# Altium PCB current_unit.PcbDoc
Units mm, origin at the board's own origin, x right, y up, seen from the top; angles counter-clockwise.
Board outline 45 x 25 mm, 4 copper layers (Top Layer, Signal Layer 1, Internal Plane 1, Bottom Layer), stack 1.48 mm thick; 35 components, 30 nets, 136 pads, 45 vias.
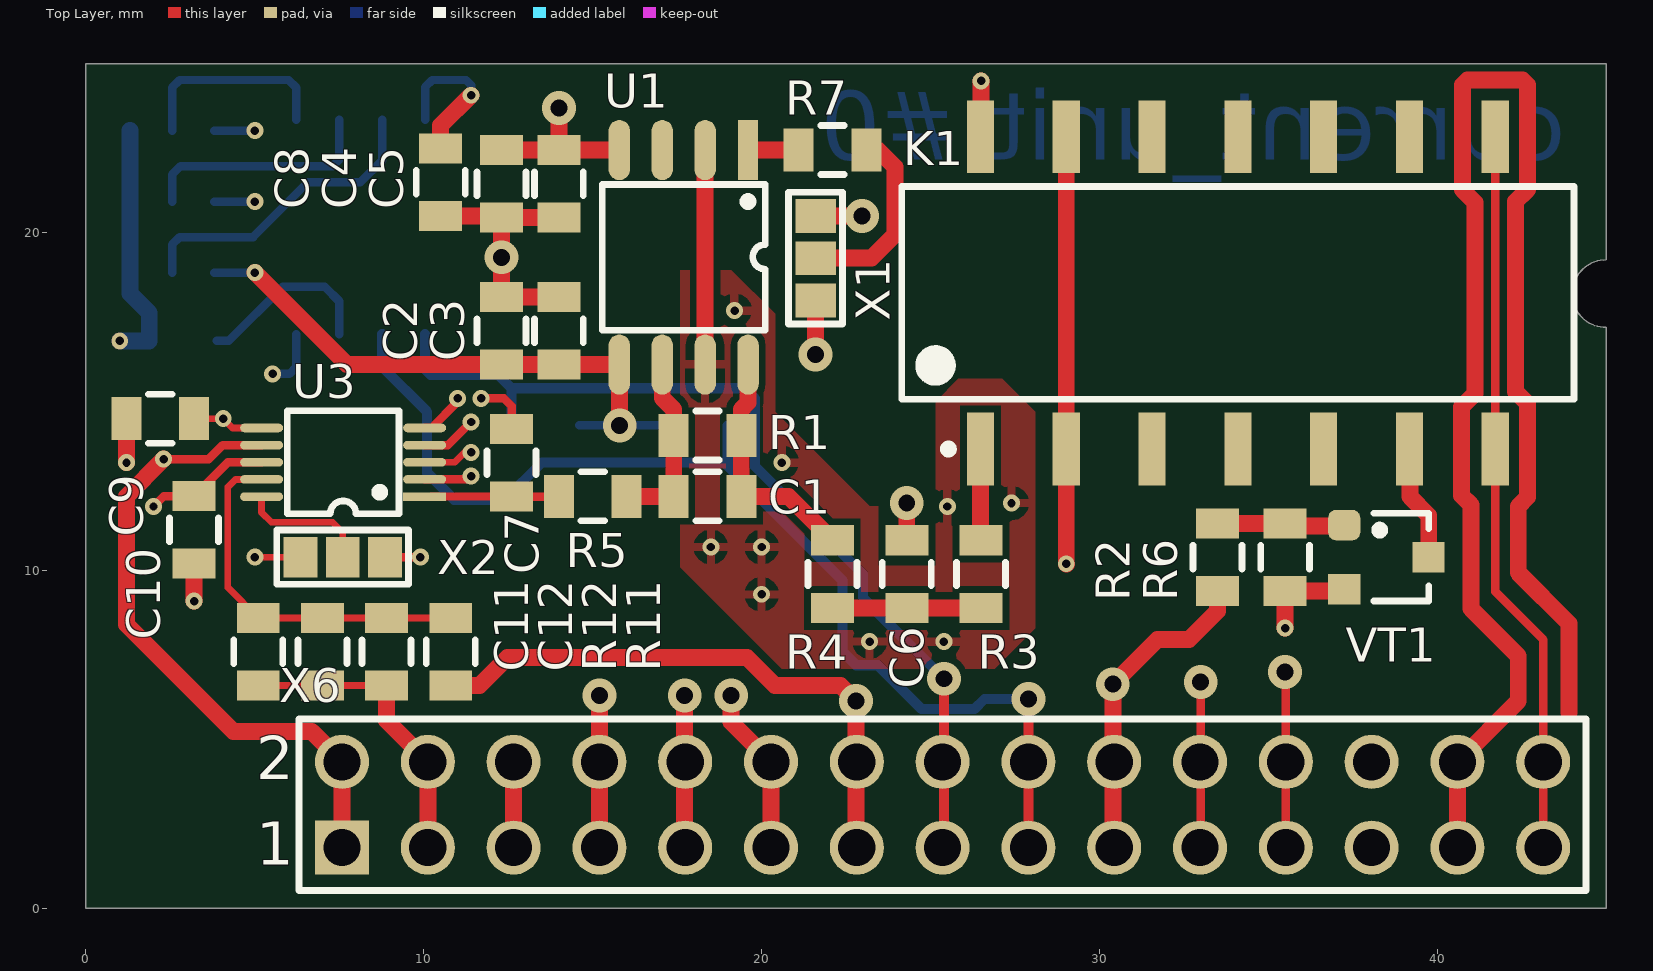
[diagram p0: Top Layer view]
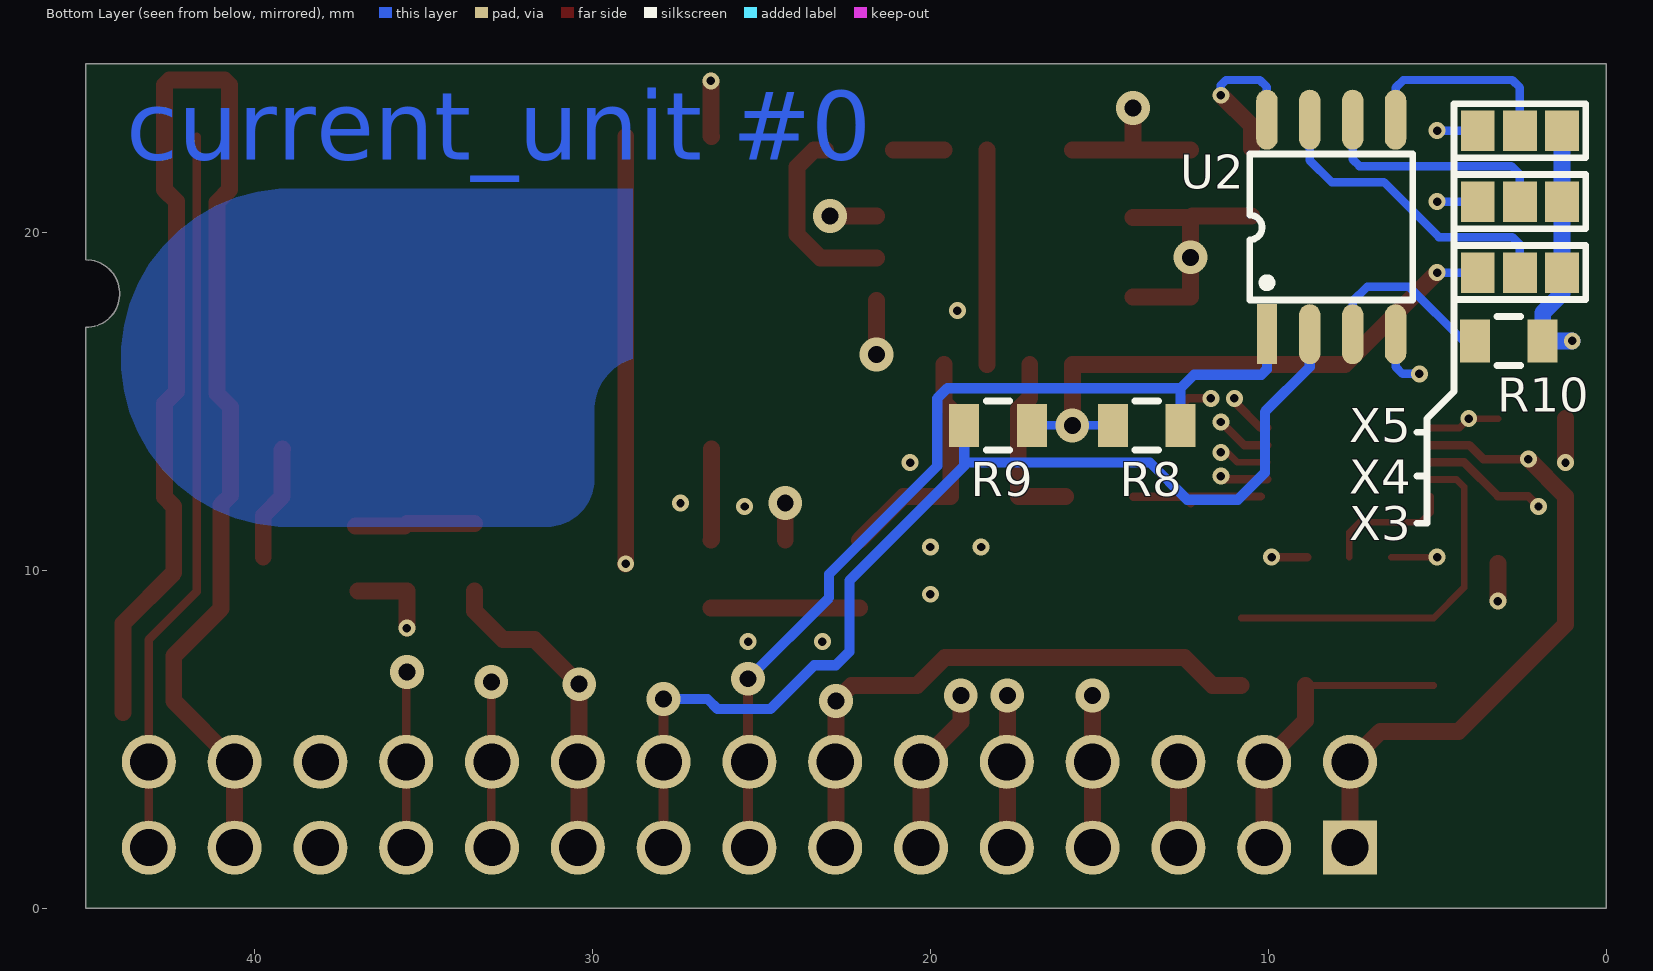
[diagram p1: Bottom Layer view, seen from below]
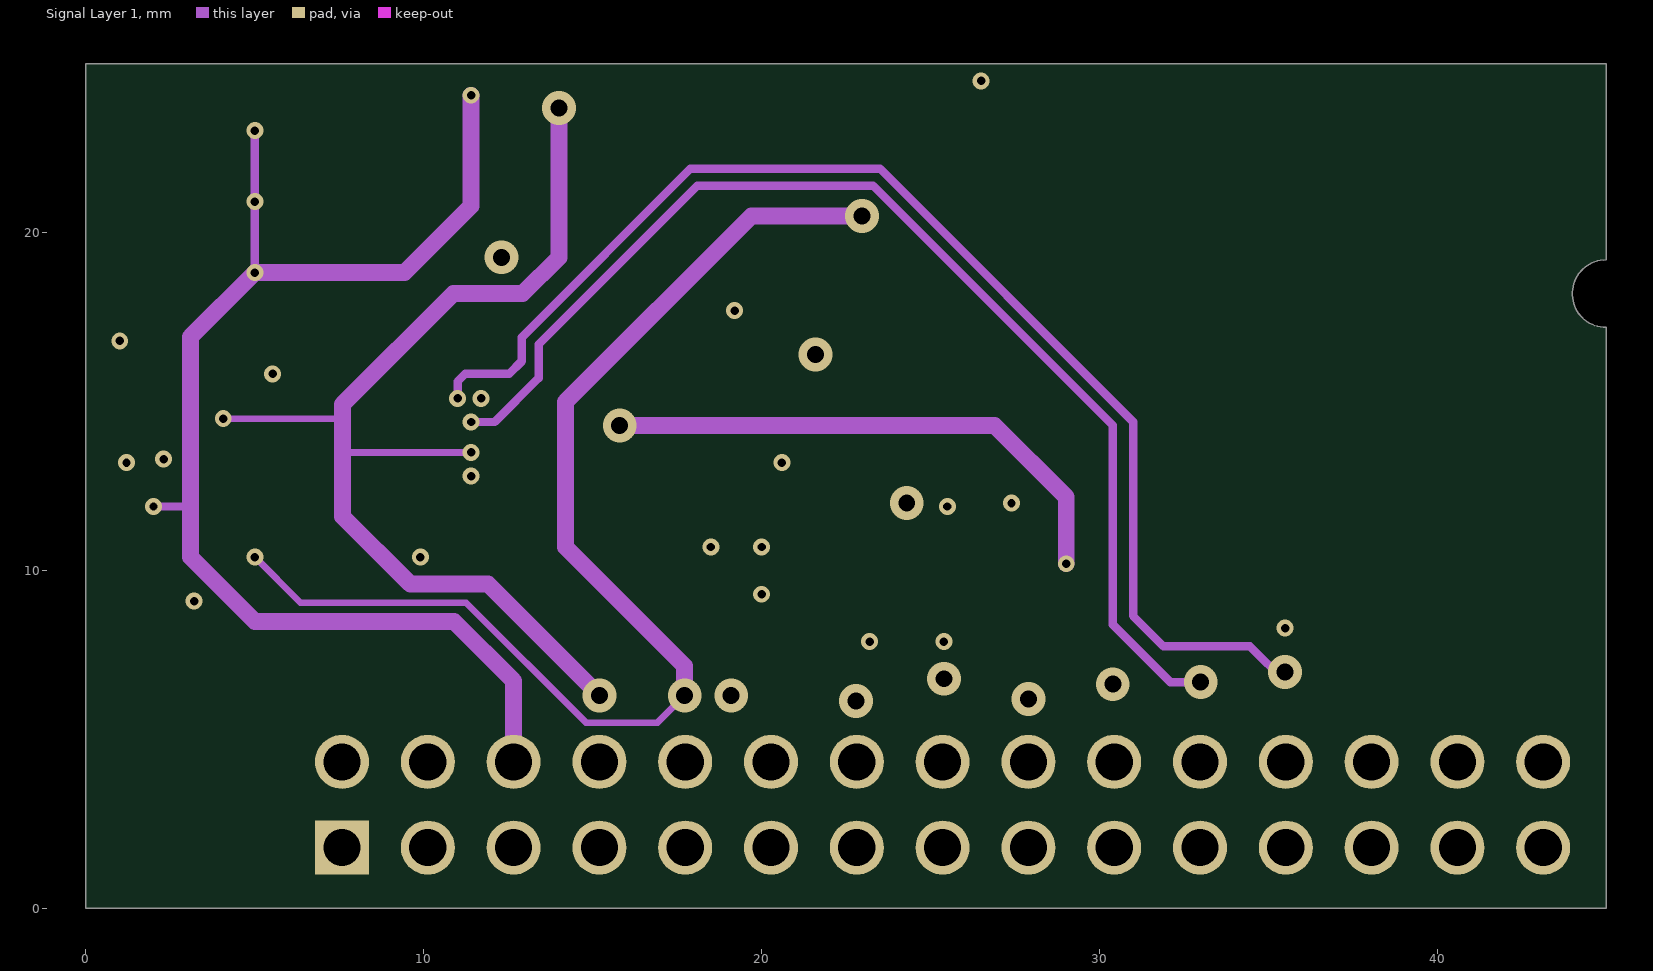
[diagram p2: Signal Layer 1]
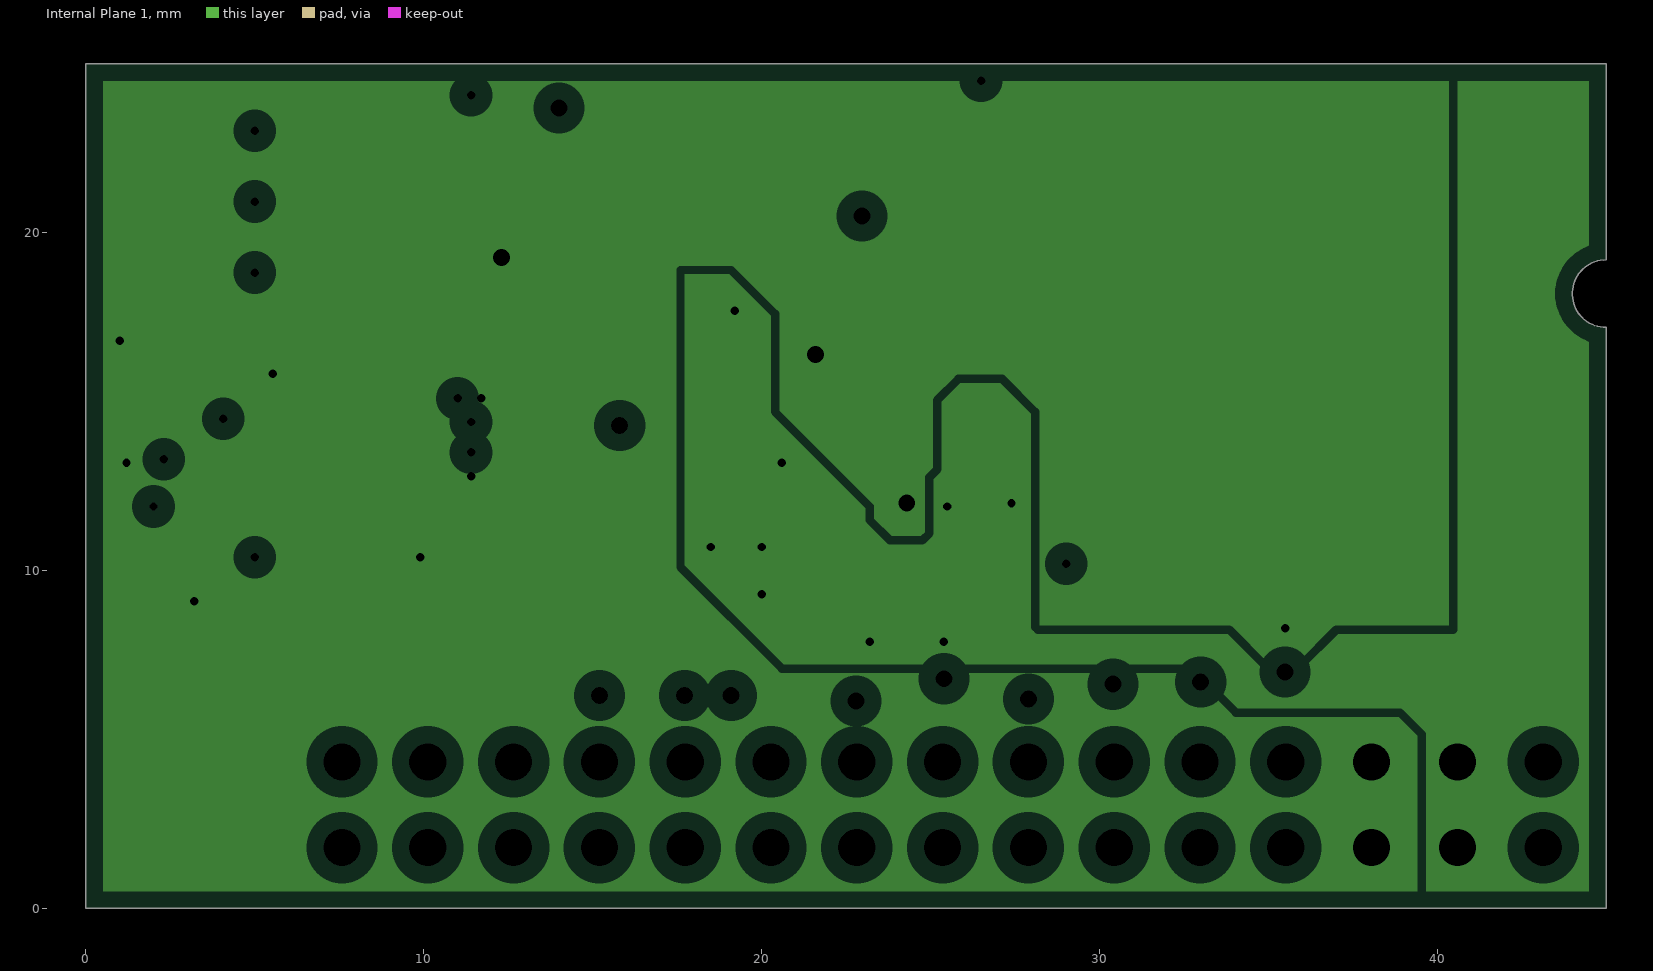
[diagram p3: Internal Plane 1, clearances drawn from the general rule]
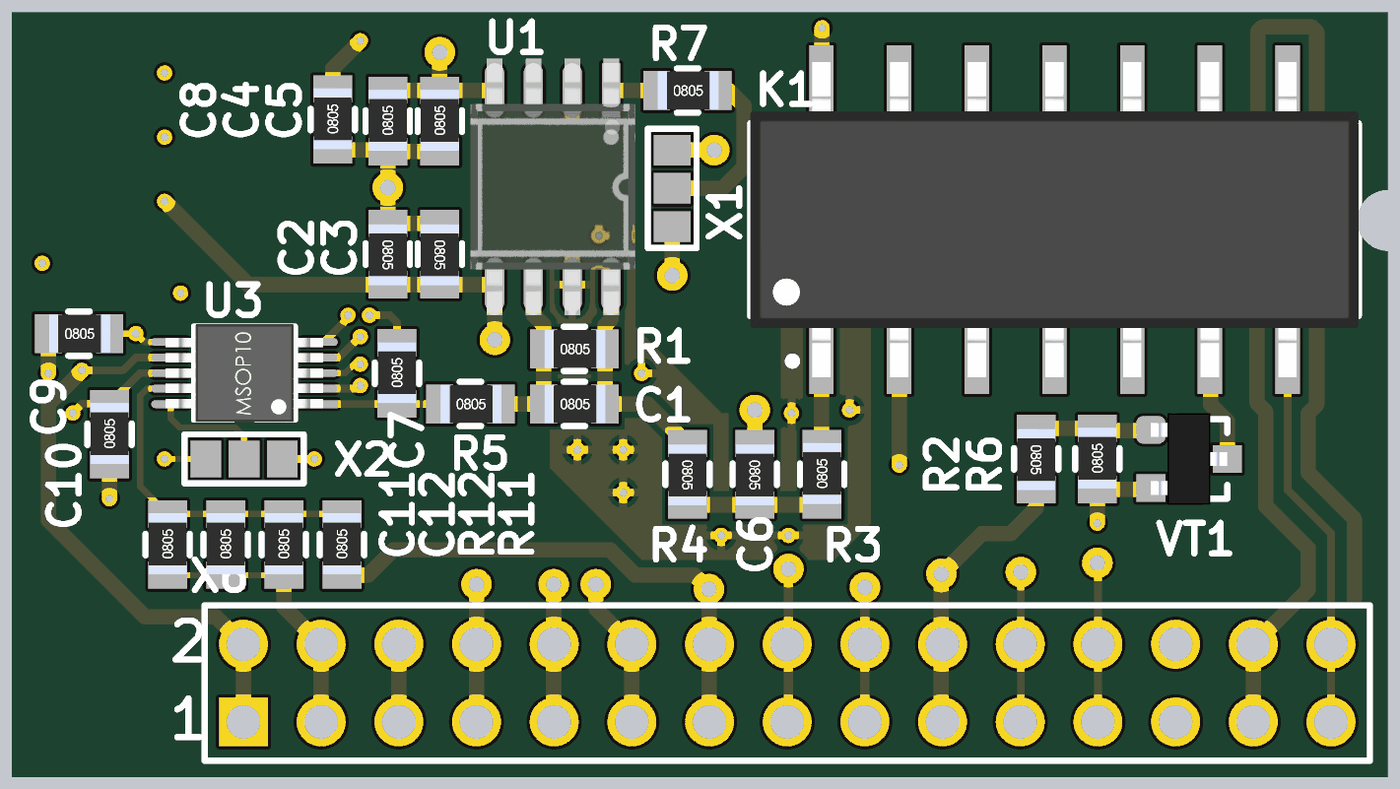
[diagram p4: 3D render of the assembled board from above, using the file's embedded part models]
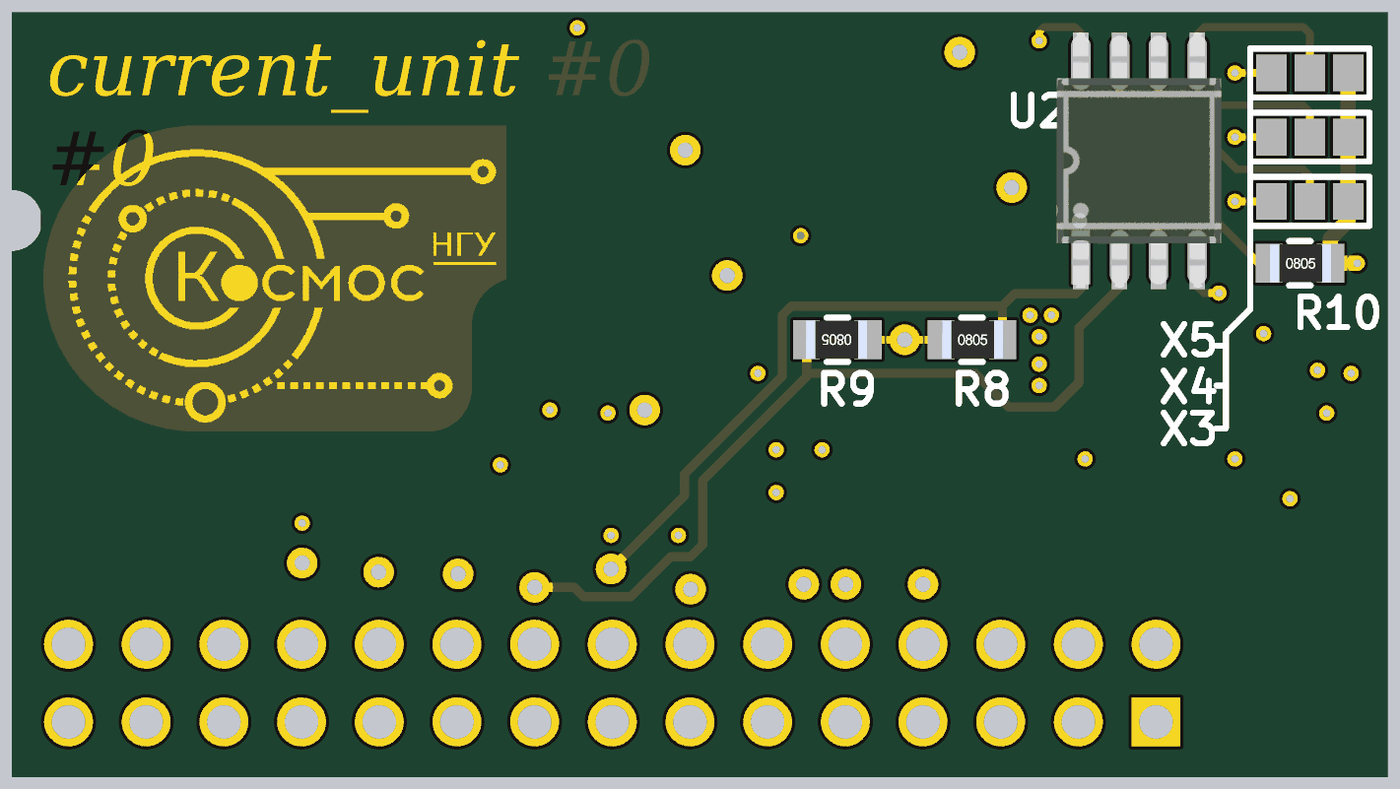
[diagram p5: 3D render of the assembled board from below, using the file's embedded part models]

## Layer stack, top to bottom
Top Solder: solder mask 0.01, Solder Resist, Dk 3.5
Top Layer: signal copper 0.035
Dielectric1: core 0.32, FR-4, Dk 4.8
Signal Layer 1: signal copper 0.035
Dielectric2: core 0.7, FR-4, Dk 4.8
Internal Plane 1: plane copper 0.035, net (Multiple Nets)
Dielectric3: core 0.32, FR-4, Dk 4.8
Bottom Layer: signal copper 0.035
Bottom Solder: solder mask 0.01, Solder Resist, Dk 3.5

## Board outline
0,0 0,25 45,25 45,19.2 ccw(c45,18.2) 45,17.2 45,0

## Design rules (kind name [scope] priority, off if disabled: settings)
Clearance [All] p1: gap=0.2 ignorepadtopadclearanceinfootprint=FALSE
PlaneClearance [All] p1: clearance=0.508
PlaneConnect [All] p1: planeconnectstyle=Relief reliefexpansion=0.508 reliefentries=4 reliefconductorwidth=0.254 reliefairgap=0.254
PolygonConnect [All] p1: connectstyle=Relief reliefconductorwidth=0.254 reliefentries=4 polygonreliefangle="90 Angle" airgapwidth=0.254
RoutingVias [All] p1: holewidth=0.5 width=0.5 viastyle="Through Hole" minholewidth=0.2 minwidth=0.5 maxholewidth=4 maxwidth=5
SolderMaskExpansion [All] p1: expansion=0.102
Width [All] p1: maxlimit=2 minlimit=0.2 preferedwidth=0.5
28 further rules are at their usual default settings.

## Components (designator, comment, footprint, x,y, rotation, side; value= is the part's Value field where it differs from the comment)
C1 "1500пФ" CR-0805 17.4,12.2 r0 top
C2 "10мкФ" CR-0805 12.3,18.1 r270 top
C3 "0,1мкФ" CR-0805 14,18.1 r270 top
C4 "10мкФ" CR-0805 12.3,20.45 r90 top
C5 "0,1мкФ" CR-0805 14,20.45 r90 top
C6 "480нФ" CR-0805 24.3,10.9 r270 top
C7 "4,7мкФ" CR-0805 12.6,12.2 r90 top
C8 "0,1мкФ" CR-0805 10.5,20.5 r90 top
C9 "0,22мкФ" CR-0805 1.2,14.5 r0 top
C10 "0,22мкФ" CR-0805 3.2,10.208 r90 top
C11 "0,1мкФ" CR-0805 5.1,6.6 r90 top
C12 "10мкФ" CR-0805 7,6.6 r90 top
K1 "EDR3D1C05" SOP-14 26.48,13.6 r0 top
R1 "5М" CR-0805 17.4,14 r0 top
R2 "5к" CR-0805 33.5,11.4 r270 top
R3 "1к" CR-0805 26.5,8.9 r90 top
R4 "10к" CR-0805 22.1,10.9 r270 top
R5 "100" CR-0805 14,12.2 r0 top
R6 "20к" CR-0805 35.5,9.4 r90 top
R7 "10к" CR-0805 21.1,22.45 r0 top
R8 "NU" CR-0805 14.6,14.3 r180 bottom
R9 "NU" CR-0805 17,14.3 r0 bottom
R10 "10к" CR-0805 3.875,16.8 r180 bottom
R11 "10к" CR-0805 10.8,6.6 r90 top
R12 "10к" CR-0805 8.9,6.6 r90 top
U1 "ADA4530-1" SOIC-8 19.6,22.45 r180 top
U2 "TMP1075" SOIC-8 10.04,17 r180 bottom
U3 "AD8253ARM" MSOP-10 10.026,12.192 r90 top
VT1 "BC846BWT1" SOT-23 38.5,10.4 r270 top
X1 "MHDR1X3" SJMP-3 21.6,18 r0 top
X2 "MHDR1X3" SJMP-3 8.85,10.4 r90 top
X3 "MHDR1X3" SJMP-3 3.8,18.825 r270 bottom
X4 "MHDR1X3" SJMP-3 3.8,20.925 r270 bottom
X5 "MHDR1X3" SJMP-3 3.8,23.025 r270 bottom
X6 "HDR2X15" HDR2X15 7.58,1.8 r0 top

## Footprints (in the part's own frame and the unit in brackets; to place one, negate y for a bottom-side part, rotate by r counter-clockwise, add the part's x,y. Pads: shape width x height; smd on the part's side, far side on the other; paste and mask are expansions set on the pad)
CR-0805 [mil]
  rect 35x50 smd: 1(0,0) 2(78.74,0)
  silkscreen extent 26,-29 53,29, body extent 1,-25 80,25, height 17
HDR2X15 [mm] "Connector; Header; 15x2 Position"
  rect 1.6x1.6 hole 1.1: 1(0,0)
  round 1.6 hole 1.1: 2(0,2.54) 3(2.54,0) 4(2.54,2.54) 5(5.08,0) 6(5.08,2.54) 7(7.62,0) 8(7.62,2.54) 9(10.16,0) 10(10.16,2.54) 11(12.7,0) 12(12.7,2.54) 13(15.24,0) 14(15.24,2.54) 15(17.78,0) 16(17.78,2.54) 17(20.32,0) 18(20.32,2.54) 19(22.86,0) 20(22.86,2.54) 21(25.4,0) 22(25.4,2.54) 23(27.94,0) 24(27.94,2.54) 25(30.48,0) 26(30.48,2.54) 27(33.02,0) 28(33.02,2.54) 29(35.56,0) 30(35.56,2.54)
  silkscreen extent -1.27,-1.27 36.83,3.81
MSOP-10 [mil] "10-Lead Mini Small Outline Package"
  rect 10x50 smd: 1(0,0)
  oval 10x50 smd: 2(20,0) 3(40,0) 4(60,0) 5(80,0) 6(80,190) 7(60,190) 8(40,190) 9(20,190) 10(0,190)
  silkscreen extent -20,30 100,160, body extent -23,-6 103,196, height 42
SJMP-3 [mm]
  rect 1.2x1 smd: 1(0,0) 2(0,1.25) 3(0,2.5)
  silkscreen extent -0.8,-0.7 0.8,3.2
SOIC-8 [mil]
  rect 23.62x70 smd: 1(0,0)
  oval 25x70 smd: 2(50,0) 3(100,0) 4(150,0) 5(150,250) 6(100,250) 7(50,250) 8(0,250)
  silkscreen extent -20,40 170,210, body extent -31,-41 181,289, height 90
SOP-14 [mm] "SOP, 14-Leads, Body 19,90x6,90mm, Pitch 2,54mm, IPC Medium Density"
  rect 0.8x2.15 smd: 1(0,0) 2(2.54,0) 3(5.08,0) 4(7.62,0) 5(10.16,0) 6(12.7,0) 7(15.24,0) 8(15.24,9.25) 9(12.7,9.25) 10(10.16,9.25) 11(7.62,9.25) 12(5.08,9.25) 13(2.54,9.25) 14(0,9.25)
  silkscreen extent -2.33,-0.12 17.57,7.78, body extent -2.33,-0.53 17.57,9.77, height 6
SOT-23 [mm]
  rrect50% 0.9x0.95 smd: 1(-0.95,-1.25)
  rect 0.9x0.95 smd: 2(0.95,-1.25) 3(0,1.25)
  silkscreen extent -1.3,-0.38 1.3,1.25, body extent -1.5,-1.25 1.5,1.25, height 1.08

## Part data
C1 C2 C3 C4 C5 C6 C7 C8 C9 C10 C11 C12: library part C_smd, "Конденсатор для поверхностного монтажа", Назначение=Чип-конденсатор, Наименование="К10-79 МП0 «ВП»", Потребление, Вт=0
K1: "Reed Relay", Назначение="Герконовое реле", Наименование=EDR3D1C05, Потребление, Вт=0,125
R1 R2 R3 R4 R5 R6 R7 R8 R9 R10 R11 R12: library part R_smd, "Резистор для поверхностного монтажа", Назначение=Чип-резистор, Наименование="Р1-12-0.125 ОСМ", Потребление, Вт=0,001
U1: library part ADA4530, "Ultra-Low Bias Current Difet OpAmp", Назначение="Операционный усилитель с малым входным током", Наименование=ADA4530, Потребление, Вт=0,01
U2: "TMP1075 Temperature Sensor With I2C and SMBus Interface", Назначение="Датчик температуры I2C", Наименование=TMP1075DR, Потребление, Вт=0,001
U3: library part AD8253, "10 MHz, 20 V/мs, G = 1, 10, 100, 1000 iCMOS Programmable Gain Instrumentation Amplifier", Назначение="Операционный усилитель с программируемым КУ (1, 10, 100, 1000)", Наименование=AD8253ARM, Потребление, Вт=0,05
VT1: "General Purpose Transistor, NPN Silicon, 3-Pin SC70, Tape and Reel", Manufacturer="On Semiconductor", ComponentLink1Description="Manufacturer URL", ComponentLink1URL=http://www.onsemi.com/, ComponentLink2Description=Datasheet, ComponentLink2URL=http://www.onsemi.cn/pub_link/Collateral/BC846AWT1-D.PDF, ComponentLink3Description="Package Specification", ComponentLink3URL=http://www.onsemi.cn/pub_link/Collateral/419-04.PDF, DatasheetVersion="Rev. 9", fT Min (MHz)=100, IC Continuous (A)=0.1, Mounting Technology="Surface Mount", Note1=0, PackageDescription="3-Pin Small Outline Transistor, Body 2 x 1.25 mm, Pitch 0.65 mm", PackageReference=SC-70-3-419-04, PackageVersion="Rev. N, 11/2008", Packing="Tape and Reel", PartNumber=BC846BWT1, Polarity=NPN, RoHS=FALSE, Назначение="Транзистор NPN", Наименование=BC846W, Потребление, Вт=0,01
X1 X2 X3 X4 X5: "Header, 3-Pin", LatestRevisionDate=17-Jul-2002, LatestRevisionNote="Re-released for DXP Platform.", Publisher="Altium Limited", Назначение="Вилка штыревая 2мм 1х3 прямая", Наименование=PLS2-3
X6: "Header, 15-Pin, Dual row", LatestRevisionDate=17-Jul-2002, LatestRevisionNote="Re-released for DXP Platform.", Publisher="Altium Limited", Назначение="Вилка штыревая 2.54мм 2х15 угловая", Наименование=PLD-30R

## Via types
v1: diameter 0.5, hole 0.25, Top Layer to Bottom Layer, 30 vias
v2: diameter 1, hole 0.5, Top Layer to Bottom Layer, 15 vias

## Nets (pads, with @x,y where several pads share a name; then routed paths per layer and width w, separated by ;. In a path a pad name is that pad's centre, name@x,y a point inside that pad or via, vN(x,y) a via of type N, cw(c..) or ccw(c..) an arc to the next point about the centre after c; other vN are vias at no path point)
+0V15: X1.3 X2.3 X6.9 X6.10 | length 43.5
  Top Layer w0.2: v1(5,10.4) X2.3
  Top Layer w0.5: v2(17.724,6.3) 17.724,1.816 X6.9 ; X1.3 v2(22.975,20.5)
  Signal Layer 1 w0.2: v1(5,10.4) 6.35,9.05 11.25,9.05 14.8,5.5 16.924,5.5 v2(17.724,6.3)
  Signal Layer 1 w0.5: v2(17.724,6.3) 17.724,7.176 14.2,10.7 14.2,15 19.7,20.5 v2(22.975,20.5)
+1V024_ref: C11.2 C12.2 R11.2 R12.2 U3.9 | length 11
  Top Layer w0.2: U3.9 4.425,12.7 4.2,12.475 4.2,9.5 C11.2 C12.2 R12.2 R11.2
+2V048_ref: R11.1 X6.13 X6.14 | length 17.2
  Top Layer w0.5: R11.1 11.65,6.6 12.475,7.425 19.575,7.425 20.4,6.6 22.34,6.6 v2(22.8,6.14) 22.8,1.82 X6.13
+5V: C2.2 C3.2 C8.2 C10.2 K1.2 K1.13 R8.1 R9.1 U1.5 U2.8 U3.8 X3.1 X4.1 X5.1 X6.5 X6.6 | length 97.9
  Top Layer w0.25: v1(2,11.9) 2.308,12.208 C10.2 4.2,13.208 U3.8
  Top Layer w0.5: v1(5,18.825) 7.725,16.1 C2.2 C3.2 U1.5 ; C8.2 10.5,23.175 v1(11.4,24.075) ; X6.5 X6.6 ; v2(15.8,14.3) U1.5@15.8,16.09 ; K1.13 K1.2 v1(29.02,10.205) v1@29.025,10.2
  Signal Layer 1 w0.25: v1(2,11.9) 3.1,11.9 ; v1(5,18.825) v1(5,20.925) v1(5,23.025)
  Signal Layer 1 w0.5: v1(11.4,24.075) 11.4,20.8 9.425,18.825 v1(5,18.825) 3.1,16.925 3.1,11.9 3.1,10.4 5,8.5 10.9,8.5 12.66,6.74 X6.6 ; v2(15.8,14.3) 26.9,14.3 29.02,12.18 v1(29.02,10.205)
  Bottom Layer w0.25: X3.1 v1(5,18.825) ; X4.1 v1(5,20.925) ; X5.1 v1(5,23.025) ; U2.8 10.04,24.315 10.25,24.525 11.25,24.525 11.4,24.375 v1(11.4,24.075) ; R8.1 v2(15.8,14.3) R9.1
-0V15: X6.11 X6.12 | length 5
  Top Layer w0.5: v2(19.1,6.3) 19.1,5.52 X6.12 X6.11
-5V: C4.2 C5.2 C9.2 U1.4 U3.3 U3.6 X6.7 X6.8 | length 46
  Top Layer w0.2: C9.2 v1(4.064,14.5) 4.34,14.224 U3.6 ; U3.3 10.908,13.208 11.2,13.5 v1(11.4,13.5)
  Top Layer w0.5: C4.2 C5.2 ; v2(14,23.7) C5.2 ; X6.7 X6.8 v2(15.2,6.3) ; U1.4 C5.2
  Signal Layer 1 w0.2: v1(4.064,14.5) 7.6,14.5 ; 7.6,13.6 7.7,13.5 v1(11.4,13.5)
  Signal Layer 1 w0.5: v2(14,23.7) 14,19.275 12.925,18.2 10.875,18.2 7.6,14.925 7.6,14.5 7.6,13.6 7.6,11.6 9.6,9.6 11.9,9.6 v2(15.2,6.3)
A0: U2.7 X3.2 | length 9.3
  Bottom Layer w0.25: X3.2 2.55,19.65 2.775,19.875 4.95,19.875 6.575,21.5 8.125,21.5 8.77,22.145 U2.7
A1: U2.6 X4.2 | length 7.1
  Bottom Layer w0.25: X4.2 2.55,21.725 2.8,21.975 7.3,21.975 7.5,22.175 U2.6
A2: U2.5 X5.2 | length 6.1
  Bottom Layer w0.25: X5.2 2.55,24.3 2.775,24.525 6,24.525 6.23,24.295 U2.5
CH_KU0: U3.4 X6.21 X6.22 | length 41.2
  Top Layer w0.25: U3.4 10.716,13.716 v1(11.4,14.4) ; X6.21 33,1.82 v2(33,6.7)
  Signal Layer 1 w0.25: v1(11.4,14.4) 12.1,14.4 13.4,15.7 13.4,16.7 18.1,21.4 23.3,21.4 30.4,14.3 30.4,8.4 32.1,6.7 v2(33,6.7)
CH_KU1: U3.5 X6.23 X6.24 | length 44
  Top Layer w0.25: U3.5 10.224,14.224 11,15 v1(11,15.1) ; X6.23 X6.24 v2@35.52,6.7
  Signal Layer 1 w0.25: v1(11,15.1) 11,15.6 11.225,15.825 12.525,15.825 12.9,16.2 12.9,16.907 17.893,21.9 23.507,21.9 31,14.407 31,8.66 31.9,7.76 34.46,7.76 v2@35.52,6.7
  other v2: 35.5,7
CH_ZERO: R2.2 X6.19 X6.20 | length 9.5
  Top Layer w0.5: X6.19 30.4,1.84 v2(30.4,6.64) v2(30.4,6.64) 30.432,6.668 31.723,7.96 32.66,7.96 33.5,8.8 R2.2
GND: C2.1 C3.1 C4.1 C5.1 C6.1 C7.2 C8.1 C9.1 C10.1 K1.14 R6.1 R10.2 U2.4 U3.2 VT1.2 X1.1 X2.1 X3.3 X4.3 X5.3 X6.25 X6.26 | length 29.9
  Top Layer w0.25: X2.1 v1(9.9,10.4) ; U3.2 11.3,12.7 v1(11.4,12.8) ; v1@11.9,15.1 12.375,15.1 12.6,14.875 C7.2
  Top Layer w0.5: v1(1.2,13.2) C9.1 ; v1(3.2,9.1) C10.1 ; C8.1 12.25,20.5 C4.1 ; C3.1 C2.1 v2(12.3,19.275) C4.1 ; C5.1 C4.1 ; v2(21.6,16.4) X1.1 ; C6.1 v2(24.3,12) ; K1.14 26.5,22.87 v1(26.5,24.5) ; v1(35.5,8.3) R6.1 VT1.2@36.95,9.4
  Bottom Layer w0.25: v1(5.525,15.825) 6.02,15.825 6.23,16.035 U2.4
  Bottom Layer w0.5: v1(1,16.8) R10.2 1.875,17.625 1.3,18.2 X3.3 X4.3 X5.3
  other v1: 11.7,15.1
GND_A: C11.1 C12.1 R12.1 X6.3 X6.4 | length 9.1
  Top Layer w0.2: C11.1 C12.1 R12.1
  Top Layer w0.5: R12.1 8.9,5.56 X6.4 X6.3
I2C_SCL: R9.2 U2.2 X6.17 X6.18 | length 33.2
  Top Layer w0.3: X6.17 X6.18 v2(27.9,6.2)
  Bottom Layer w0.3: U2.2 8.77,16.03 10.1,14.7 10.1,12.9 10.9,12.1 12.4,12.1 13.5,13.2 19,13.2 ; R9.2 19,13.2 ; v2(27.9,6.2) 26.6,6.2 26.3,5.9 24.74,5.9 23.44,7.2 22.8,7.2 22.4,7.6 22.4,9.704 19,13.104 19,13.2
I2C_SDA: R8.2 U2.1 X6.15 X6.16 | length 27.9
  Top Layer w0.3: X6.15 25.4,1.84 v2(25.4,6.8)
  Bottom Layer w0.3: U2.1 10.04,15.96 10.2,15.8 12.2,15.8 12.6,15.4 ; R8.2 12.6,15.4 ; v2(25.4,6.8) 23,9.2 23,9.9 19.8,13.1 19.8,15.1 19.5,15.4 12.6,15.4
I_CH: K1.7 K1.8 X6.29 X6.30 | length 21.6
  Top Layer w0.254: K1.8 K1.7 41.72,9.38 43.14,7.96 X6.30 X6.29
I_GRD: U1.2 U1.7 X6.27 X6.28 | length 52.3
  Top Layer w0.5: U1.7 U1.2 ; X6.27 X6.28 42.4,6.14 42.4,7.473 41,8.873 41,11.95 40.725,12.225 40.725,14.85 41.125,15.25 41.125,20.9 40.75,21.275 40.75,24.375 40.9,24.525 42.525,24.525 42.675,24.375 42.675,21.275 42.325,20.925 42.325,15.3 42.675,14.95 42.675,12.175 42.4,11.9 42.4,9.937 43.9,8.437 43.9,5.8
  other v1: 23.2,7.9 25.4,7.9 20,9.3 18.5,10.7 20,10.7 25.5,11.9 27.4,12 20.6,13.2 19.2,17.7
NetC1_1: C1.1 R1.1 R5.2 U1.6 | length 5.4
  Top Layer w0.5: R5.2 C1.1 R1.1 17.4,14.775 17.06,15.115 U1.6
NetC1_2: C1.2 R1.2 R4.1 U1.8 | length 7.2
  Top Layer w0.5: U1.8 19.6,14.975 19.4,14.775 R1.2 C1.2 20.8,12.2 R4.1
NetC6_2: C6.2 R3.1 R4.2 | length 4.4
  Top Layer w0.5: R4.2 R3.1
NetK1_1: K1.1 R3.2 | length 2.7
  Top Layer w0.5: K1.1 26.48,10.92 R3.2
NetK1_6: K1.6 VT1.3 | length 3.4
  Top Layer w0.5: K1.6 39.2,13.58 39.2,12.187 39.75,11.637 VT1.3
NetR2_1: R2.1 R6.2 VT1.1 | length 3.6
  Top Layer w0.5: R2.1 R6.2 35.575,11.325 VT1.1@37.025,11.325
NetR7_1: R7.1 U1.1 | length 1.5
  Top Layer w0.5: U1.1 R7.1
NetR7_2: R7.2 X1.2 | length 5.7
  Top Layer w0.5: X1.2 23.25,19.25 23.95,19.95 23.95,21.95 23.45,22.45 R7.2
NetR10_1: R10.1 U2.3 | length 5.4
  Bottom Layer w0.25: R10.1 4.225,16.8 5.825,18.4 7.075,18.4 7.5,17.975 U2.3
NetU3_10: U3.10 X2.2 | length 3.8
  Top Layer w0.2: U3.10 5.2,11.725 5.492,11.433 7.304,11.433 7.6,11.137 X2.2
V_CURR: U3.7 X6.1 X6.2 | length 19
  Top Layer w0.25: v1(2.3,13.3) 3.634,13.3 4.05,13.716 U3.7
  Top Layer w0.5: v1(2.3,13.3) 1.2,12.2 1.2,8.4 4.364,5.236 6.684,5.236 X6.2 X6.1
V_CURR_ROW: C7.1 R5.1 U3.1 | length 4.1
  Top Layer w0.25: U3.1@10.226,12.196 12.5,12.196 12.4,12.192 R5.1@14,12.192 ; C7.1@12.3,12.1 C7.1@12.4,12.1
pads on no net: K1.3 K1.4 K1.5 K1.9 K1.10 K1.11 K1.12 U1.3

## Polygon pours and split planes (outlines as drawn)
I_GRD on Top Layer "Top Layer-I_GRD" (solid, pour order 2): 17.6,18.9 17.6,15.2 17.6,10.1 20.6,7.1 26.9,7.1 28.1,8.3 28.1,14.7 27.125,15.675 25.825,15.675 25.15,15 25.15,10.15 23.45,10.15 23.45,11.9 23.2,11.9 20.4,14.7 20.4,17.6 19.1,18.9
no net on Bottom Layer " " (solid, pour order 6): 31.356,11.303 cw(c31.356,12.703) 29.956,12.703 29.956,14.744 ccw(c28.356,14.744) 28.818,16.276 28.818,21.303 38.936,21.303 cw(c38.936,16.283) 43.956,16.283 cw(c38.976,16.283) 38.976,11.303
GND on Internal Plane 1 (split plane): 40.348,8.377 37.012,8.377 36.963,8.368 36.922,8.34 35.871,7.289 35.862,7.29 34.99,7.29 33.937,8.343 33.896,8.371 33.847,8.38 28.227,8.38 28.227,14.7 28.218,14.749 28.19,14.79 27.215,15.765 27.174,15.793 27.125,15.802 25.825,15.802 25.784,15.794 25.776,15.793 25.735,15.765 25.11,15.14 25.082,15.099 25.073,15.05 25.073,13.053 24.876,12.856 24.849,12.815 24.839,12.766 24.839,11.157 24.71,11.027 23.853,11.027 23.327,11.553 23.327,11.9 23.319,11.941 23.318,11.949 23.29,11.99 20.527,14.753 20.527,17.6 20.518,17.649 20.49,17.69 19.19,18.99 19.149,19.018 19.1,19.027 17.6,19.027 17.551,19.018 17.51,18.99 17.482,18.949 17.473,18.9 17.473,15.25 17.473,14.825 17.473,10.1 17.482,10.051 17.51,10.01 20.51,7.01 20.551,6.982 20.6,6.973 32.687,6.973 33.95,5.71 33.991,5.682 34.04,5.673 38.847,5.673 39.421,5.098 39.421,0.51 0.51,0.51 0.51,24.49 40.348,24.49
I_GRD on Internal Plane 1 (split plane): 44.49,19.621 44.345,19.561 44.196,19.479 44.058,19.381 43.932,19.268 43.819,19.142 43.721,19.004 43.639,18.855 43.574,18.699 43.527,18.536 43.499,18.369 43.49,18.2 43.499,18.031 43.527,17.864 43.574,17.701 43.639,17.545 43.721,17.396 43.819,17.258 43.932,17.132 44.058,17.019 44.196,16.921 44.345,16.839 44.49,16.779 44.49,0.51 39.676,0.51 39.676,5.151 39.668,5.192 39.667,5.2 39.639,5.241 38.99,5.89 38.949,5.918 38.9,5.927 34.093,5.927 32.83,7.19 32.789,7.218 32.74,7.227 20.653,7.227 17.727,10.153 17.727,14.825 17.727,15.25 17.727,18.773 19.047,18.773 20.273,17.547 20.273,14.7 20.282,14.651 20.31,14.61 23.073,11.847 23.073,11.5 23.082,11.451 23.11,11.41 23.71,10.81 23.738,10.791 23.751,10.782 23.8,10.773 24.762,10.773 24.811,10.782 24.852,10.81 25.056,11.014 25.084,11.055 25.094,11.104 25.094,12.714 25.29,12.91 25.318,12.951 25.327,13 25.327,14.997 25.878,15.548 27.072,15.548 27.973,14.647 27.973,8.325 27.982,8.276 28.01,8.235 28.051,8.207 28.054,8.207 28.054,8.204 28.082,8.163 28.123,8.135 28.172,8.125 33.794,8.125 34.847,7.073 34.888,7.045 34.937,7.035 35.862,7.035 35.894,7.042 35.925,7.035 35.974,7.045 36.015,7.073 37.065,8.123 40.475,8.123 40.524,8.132 40.565,8.16 40.593,8.201 40.602,8.25 40.602,24.49 44.49,24.49

## Other copper
Bottom Layer:
  text "current_unit #0" at 43.8,21.5 h3.5
Internal Plane 1 (plane layer: these items are gaps in the copper):
  lines w0.25: 26.8,7.1 32.74,7.1 34.04,5.8 38.9,5.8 39.549,5.151 39.549,0 ; 26.875,7.1 20.6,7.1 17.6,10.1 17.6,14.825 17.6,15.25 17.6,18.9 19.1,18.9 20.4,17.6 20.4,14.7 23.2,11.9 23.2,11.5 23.8,10.9 24.762,10.9 24.966,11.104 24.966,12.766 25.2,13 25.2,15.05 25.825,15.675 27.125,15.675 28.1,14.7 28.1,8.325 ; 28.172,8.253 33.847,8.253 34.937,7.163 35.862,7.163 ; 35.925,7.163 37.012,8.25 40.475,8.25 40.475,25
  lines w0.5: 40.125,25 40.475,25

## Silkscreen, mask and mechanical layers (free items; w line width, h text height)
Bottom Overlay:
  lines w0.2: 4.5,23.1 4.5,15.3 5.3,14.5 5.3,11.4 5.6,11.4 ; 5.3,12.8 5.6,12.8 ; 5.3,14.1 5.6,14.1
Bottom Solder:
  drawing of 2081 lines, arcs and shapes, not listed
  text "current_unit #0" at 43.8,21.5 h3.5
Mechanical 1:
  lines w0.1: 0,0 44.9,0 45,0.1 45,17.2 cw(c45,18.2) 45,19.2 45,25 0,25 0,0

## Text inside footprints (layer, text, board x,y; h text height)
X6: Top Overlay "2" at 5.04,3.832 h1.27; Top Overlay "1" at 5.04,1.292 h1.27